# Altium PCB NIXIE_3.PcbDoc
Units mil, origin at the board's own origin, x right, y up, seen from the top; angles counter-clockwise.
Board outline 3937.01 x 1062.99 mil, 2 copper layers (Top Layer, Bottom Layer); 12 components, 35 nets, 109 pads, 0 vias.
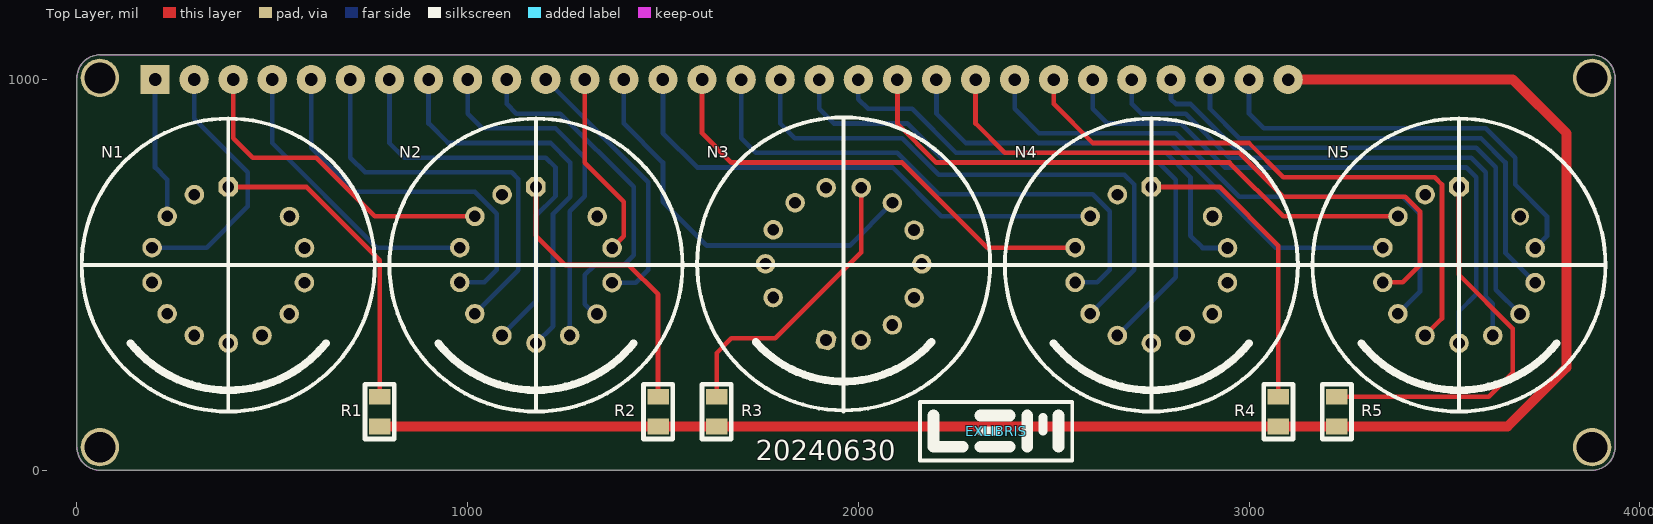
[diagram p0: Top Layer view]
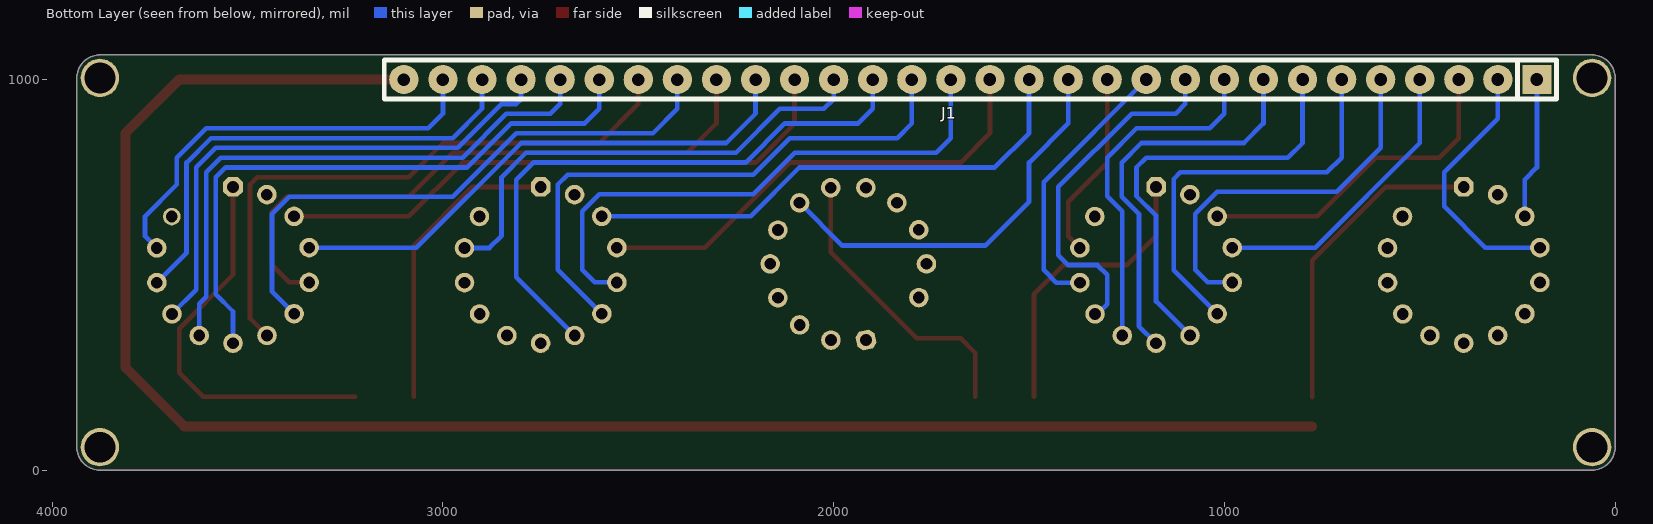
[diagram p1: Bottom Layer view, seen from below]

## Layer stack, top to bottom
Top Solder: solder mask 0.4, Solder Resist, Dk 3.5
Top Layer: signal copper 1.4
Dielectric 1: dielectric 12.6, FR-4, Dk 4.8
Bottom Layer: signal copper 1.4
Bottom Solder: solder mask 0.4, Solder Resist, Dk 3.5

## Board outline
0,59.06 0,1003.94 cw(c59.06,1003.94) 59.06,1062.99 3877.95,1062.99 cw(c3877.95,1003.94) 3937.01,1003.94 3937.01,59.06 cw(c3877.95,59.06) 3877.95,0 59.06,0 cw(c59.06,59.06)

## Design rules (kind name [scope] priority, off if disabled: settings)
Clearance [All] p1: gap=3.94 ignorepadtopadclearanceinfootprint=TRUE
ComponentClearance [All] p1: gap=0 collisioncheckmode=3 verticalgap=100000 showdistances=TRUE
Height [All] p1: minheight=0 maxheight=5000 prefheight=500
PolygonConnect [All] p1: connectstyle=Relief reliefconductorwidth=10 reliefentries=4 polygonreliefangle="90 Angle" airgapwidth=10
RoutingCorners [All] p1: cornerstyle=45-Degree minsetback=25 maxsetback=25
RoutingVias [All] p1: holewidth=28 width=50 viastyle="Through Hole" minholewidth=28 minwidth=50 maxholewidth=28 maxwidth=50
SolderMaskExpansion [All] p1: expansion=4
Width [All] p1: maxlimit=50 minlimit=10 preferedwidth=15
27 further rules are at their usual default settings.

## Classes and differential pairs
component class NIXIE_3: J1 N1 N2 N3 N4 N5 R1 R2 R3 R4 R5

## Components (designator, comment, footprint, x,y, rotation, side; value= is the part's Value field where it differs from the comment)
EXLIBRIS "EXLIBRIS" EXLBS_2 2352.5,100 r0 top
J1 "30pin" SIL30 1650.11,999.99 r0 bottom locked
N1 "LC531" "NIXIE LC531"#1 387.5,525 r0 top locked
N2 "LC531" "NIXIE LC531"#1 1175,525 r0 top locked
N3 "LL561" "NIXIE LL561" 1962.5,528.12 r0 top locked
N4 "LC531" "NIXIE LC531"#1 2750,525 r0 top locked
N5 "LC531" "NIXIE LC531"#2 3537.5,525 r0 top locked
R1 "20K" SMD_R_0805 775,150 r270 top
R2 "20K" SMD_R_0805 1487.5,150 r270 top
R3 "62K" SMD_R_0805 1637.5,150 r270 top
R4 "20K" SMD_R_0805 3075,150 r270 top
R5 "20K" SMD_R_0805 3225,150 r270 top

## Footprints (in the part's own frame and the unit in brackets; to place one, negate y for a bottom-side part, rotate by r counter-clockwise, add the part's x,y. Pads: shape width x height; smd on the part's side, far side on the other; paste and mask are expansions set on the pad)
EXLBS_2 [mil] "Exlibris TOP Layer Hight = 180mil"
  silkscreen extent -195,-75 195,75
"NIXIE LC531"#1 [mil] "Lampa Nixie LC531 NUMERYCZNA"
  oct 50x50 hole 30: 1(-0.04,200)
  round 50 hole 30: 2(-86.77,180.22) 3(-156.34,124.78) 4(-194.99,44.65) 5(-195.07,-44.31) 6(-156.56,-124.5) 7(-87.08,-180.06) 8(-0.04,-200) 9(86.38,-180.37) 10(156.05,-125.05) 11(194.84,-44.99) 12(195.07,43.97) 13(156.7,124.23)
  silkscreen extent -375,-375 375,375
"NIXIE LC531"#2 [mil] "Lampa Nixie LC531 NUMERYCZNA"
  oct 50x50 hole 30: 1(-0.04,200)
  round 50 hole 30: 2(-86.77,180.22) 3(-156.34,124.78) 4(-194.99,44.65) 5(-195.07,-44.31) 6(-156.56,-124.5) 7(-87.08,-180.06) 8(-0.04,-200) 9(86.38,-180.37) 10(156.05,-125.05) 11(194.84,-44.99) 12(195.07,43.97)
  round 45 hole 30: 13(156.7,124.23)
  silkscreen extent -375,-375 375,375
"NIXIE LL561" [mil] "Lampa Nixie LL561 ZNAKOWA"
  oct 50x50 hole 30 rot 168.75: 1(-45.16,-194.83)
  round 50 hole 30: 2(44.48,-194.99) 3(124.64,-156.41) 4(180.14,-86.89) 5(200,0) 6(180.29,86.57) 7(124.91,156.19) 8(44.82,194.91) 9(-45,195) 10(-124.37,156.63) 11(-179.99,87.2) 12(-200,0) 13(-180.44,-86.26)
  silkscreen extent -375,-375 375,375
SIL30 [mil] "Obudowa serial 30 pin"
  rect 75x75 hole 32: 1(-1450.11,-0.01)
  round 75 hole 32: 2(-1350.11,-0.01) 3(-1250.11,-0.01) 4(-1150.11,-0.01) 5(-1050.11,-0.01) 6(-950.11,-0.01) 7(-850.11,-0.01) 8(-750.11,-0.01) 9(-650.11,-0.01) 10(-550.11,-0.01) 11(-450.11,-0.01) 12(-350.11,-0.01) 13(-250.11,-0.01) 14(-150.11,-0.01) 15(-50.11,-0.01) 16(50,0) 17(150,0) 18(250,0) 19(350,0) 20(450,0) 21(550,0) 22(650,0) 23(750,0) 24(850,0) 25(950,0) 26(1050,0) 27(1150,0) 28(1250,0) 29(1350,0) 30(1450,0)
  silkscreen extent -1500,-50 1500,50, body extent -1500,-50 1500,50, height 309
SMD_R_0805 [mil] "Rozmiar 0805 -> 80x50mil"
  rect 40x55 smd: 1(-38,0) 2(38,0)
  silkscreen extent -70,-38 70,38, body extent -39,-24 39,25, height 31

## Part data
EXLIBRIS: library part EXLBR
J1: library part "CON 30pin"
N1 N2 N4 N5: library part "NIXIE LC531", "Lampa Numeryczna Nixie"
N3: library part "NIXIE LL561", "SIGN NEON LAMP"
R1 R2 R3 R4 R5: library part R, "Resistor"

## Free pads (board coordinates)
  round 98.43 hole 78.74: 0(59.06,1003.94) 0(59.06,59.06) 0(3877.95,59.06) 0(3877.95,1003.94)

## Nets (pads, with @x,y where several pads share a name; then routed paths per layer and width w, separated by ;. In a path a pad name is that pad's centre, name@x,y a point inside that pad or via, vN(x,y) a via of type N, cw(c..) or ccw(c..) an arc to the next point about the centre after c; other vN are vias at no path point)
NetJ1_1: J1.1 N1.3 | length 363.1
  Bottom Layer w12: J1.1 200,775 231.16,743.84 N1.3
NetJ1_2: J1.2 N1.4 | length 678.7
  Bottom Layer w12: N1.4@184.39,569.65 N1.4 332.15,569.65 437.5,675 437.5,762.5 300,900 J1.2
NetJ1_3: J1.3 N2.3 | length 851.6
  Top Layer w12: J1.3 400,850 450,800 612.5,800 762.5,650 1018.43,650 N2.3
NetJ1_4: J1.4 N2.4 | length 753.5
  Bottom Layer w12: J1.4 500,837.5 767.85,569.65 N2.4
NetJ1_5: J1.5 N2.5 | length 971.9
  Bottom Layer w12: J1.5 600,825 712.5,712.5 1018.75,712.5 1075,656.25 1075,512.5 1043.19,480.69 N2.5
NetJ1_6: J1.6 N2.6 | length 1043.2
  Bottom Layer w12: J1.6 700,800 737.5,762.5 1112.5,762.5 1129.69,745.31 1129.69,511.75 N2.6
NetJ1_7: J1.7 N2.7 | length 1100.2
  Bottom Layer w12: J1.7 800,837.5 837.5,800 1200,800 1225,775 1225,701.75 1175,651.75 1175,432.02 N2.7
NetJ1_8: J1.8 N2.8 | length 1015.2
  Bottom Layer w12: J1.8 900,887.5 950,837.5 1212.5,837.5 1262.5,787.5 1262.5,700 1218.75,656.25 1218.75,368.79 N2.8
NetJ1_9: J1.9 N2.9 | length 905.5
  Bottom Layer w12: J1.9 1000,912.5 1037.5,875 1225,875 1300,800 1300,701.12 1261.38,662.5 N2.9
NetJ1_10: J1.10 N2.10 | length 875.2
  Bottom Layer w12: 1100,962.5 1100,937.5 1125,912.5 1237.5,912.5 1425,725 1425,550 1400,525 1325,525 1300,500 1300,425 1325.05,399.95 N2.10
NetJ1_11: J1.11 N2.11 | length 702.4
  Bottom Layer w12: J1.11 1462.5,737.5 1462.5,512.5 1430.01,480.01 N2.11
NetJ1_12: J1.12 N2.12 | length 484.9
  Top Layer w12: J1.12 1300,787.5 1400,687.5 1400,598.9 N2.12
NetJ1_13: J1.13 N3.7 | length 1033.3
  Bottom Layer w12: J1.13 1400,887.5 1500,787.5 1500,687.5 1612.5,575 1978.09,575 N3.7 N3.7@2087.5,684.41
NetJ1_14: J1.14 N4.3 | length 1331.8
  Bottom Layer w12: J1.14@1500,1012.5 J1.14 1500,862.5 1587.5,775 2087.5,775 2212.72,649.78 N4.3
NetJ1_15: J1.15 N4.4 | length 1213.8
  Top Layer w12: J1.15 1600,862.5 1675,787.5 2112.5,787.5 2330.35,569.65 N4.4
NetJ1_16: J1.16 N4.5 | length 1423.4
  Bottom Layer w12: J1.16 1700.11,849.89 1737.5,812.5 2100,812.5 2206.25,706.25 2600,706.25 2643.75,662.5 2643.75,512.5 2611.94,480.69 N4.5
NetJ1_17: J1.17 N4.6 | length 1460.9
  Bottom Layer w12: J1.17 1800.11,887.39 1837.5,850 2112.5,850 2206.25,756.25 2681.25,756.25 2706.25,731.25 2706.25,513.31 N4.6
NetJ1_18: J1.18 N4.7 | length 1523.7
  Bottom Layer w12: J1.18 1900.11,924.89 1937.5,887.5 2125,887.5 2225,787.5 2768.75,787.5 2812.5,743.75 2812.5,493.75 2663.69,344.94 N4.7
NetJ1_19: J1.19 N4.12 | length 1240.7
  Bottom Layer w12: J1.19 2000.11,949.89 2025,925 2137.5,925 2250,812.5 2787.5,812.5 2850,750 2850,600 2881.03,568.97 N4.12
NetJ1_20: J1.20 N5.3 | length 1492.1
  Top Layer w12: J1.20 2100.11,887.39 2200,787.5 2950,787.5 3087.72,649.78 N5.3@3375.22,649.78
  Bottom Layer w12: N5.3@3375.22,649.78 N5.3
NetJ1_21: J1.21 N5.4 | length 1372
  Bottom Layer w12: J1.21 2200.11,912.39 2275,837.5 2800,837.5 3067.85,569.65 N5.4
NetJ1_22: J1.22 N5.5 | length 1594.2
  Top Layer w12: J1.22 2300,999.89 2300,887.5 2375,812.5 2975,812.5 3087.5,700 3400,700 3437.5,662.5 3437.5,525 3393.19,480.69 N5.5
NetJ1_23: J1.23 N5.6 | length 1502.9
  Bottom Layer w12: J1.23 2400.11,924.89 2462.5,862.5 2812.5,862.5 2975,700 3393.75,700 3437.5,656.25 3437.5,457.06 N5.6
NetJ1_24: J1.24 N5.7 | length 1545.9
  Top Layer w12: J1.24 2500.11,937.39 2600,837.5 3000,837.5 3087.5,750 3475,750 3493.75,731.25 3493.75,388.27 N5.7
NetJ1_25: J1.25 N5.8 | length 1571.8
  Bottom Layer w12: J1.25 2600.11,924.89 2637.5,887.5 2825,887.5 2937.5,775 3556.25,775 3581.25,750 3581.25,450 3537.46,406.21 N5.8
NetJ1_26: J1.26 N5.9 | length 1466.4
  Bottom Layer w12: J1.26 2700.11,937.39 2725,912.5 2837.5,912.5 2950,800 3568.75,800 3606.25,762.5 3606.25,443.75 3623.88,426.12 N5.9
NetJ1_27: J1.27 N5.10 | length 1354.5
  Bottom Layer w12: J1.27 2800.11,949.89 2812.5,937.5 2850,937.5 2962.5,825 3581.25,825 3631.25,775 3631.25,462.25 N5.10
NetJ1_28: J1.28 N5.11 | length 1227.2
  Bottom Layer w12: J1.28 2900.11,924.89 2975,850 3593.75,850 3656.25,787.5 3656.25,556.1 N5.11
NetJ1_29: J1.29 N5.12 | length 1092.4
  Bottom Layer w12: J1.29 3000.11,912.39 3037.5,875 3606.25,875 3681.25,800 3681.25,731.25 3762.5,650 3762.5,598.9 N5.12
NetJ1_30: J1.30 R1.2 R2.2 R3.2 R4.2 R5.2 | length 4469.2
  Top Layer w25: R1.2 R2.2 R3.2 R4.2 R5.2 3662,112 3812.5,262.5 3812.5,862.5 3675.01,999.99 J1.30
NetN1_1: N1.1 R1.1 | length 815.2
  Top Layer w12: N1.1 587.5,725 775,537.5 R1.1 R1.1@775,187.5
NetN2_1: N2.1 R2.1 | length 761.6
  Top Layer w12: N2.1 1175,724.96 1175,600 1250,525 1412.5,525 1487.5,450 R2.1
NetN3_8: N3.8 R3.1 | length 754.1
  Top Layer w12: R3.1 1637.5,300 1675,337.5 1787.5,337.5 2007.32,557.32 N3.8
NetN4_1: N4.1 R4.1 | length 774.2
  Top Layer w12: N4.1 2925,725 3075,575 R4.1
NetN5_1: N5.1 R5.1 | length 1007.7
  Top Layer w12: R5.1 3613,188 3675,250 3675,362.5 3537.46,500.04 N5.1
pads on no net: N1.2 N1.5 N1.6 N1.7 N1.8 N1.9 N1.10 N1.11 N1.12 N1.13 N2.2 N2.13 N3.1 N3.2 N3.3 N3.4 N3.5 N3.6 N3.9 N3.10 N3.11 N3.12 N3.13 N4.2 N4.8 N4.9 N4.10 N4.11 N4.13 N5.2 N5.13

## Keep-outs
Keep-Out Layer:
  the board outline again, w1

## Silkscreen, mask and mechanical layers (free items; w line width, h text height)
Top Overlay:
  lines w10: 12.5,525 3912.46,525 ; 387.5,150 387.5,900 ; 1175,150 1175,900 ; 1962.5,150 1962.5,900 ; 2750,150 2750,900 ; 3537.5,150 3537.5,900
  text "20240630" at 1737.5,25 h51.18

## Dimensions
0,1003.94 to 3937.01,1003.94 on Top Overlay
12.5,525 to 59.06,0 on Top Overlay
59.06,1062.99 to 12.5,525 on Top Overlay
3537.5,900 to 3937.01,1003.94 on Top Overlay
0,1003.94 to 387.5,900 on Top Overlay
59.06,59.06 to 3877.95,59.06 on Top Overlay
0,59.06 to 3937.01,59.06 on Top Overlay
3877.95,1003.94 to 3877.95,59.06 on Top Overlay
3877.95,1062.99 to 3877.95,0 on Top Overlay
2749.96,900 to 3537.46,900 on Top Overlay
1962.5,925 to 2749.96,900 on Top Overlay
1174.96,900 to 1962.5,903.12 on Top Overlay
387.46,900 to 1174.96,900 on Top Overlay